# EAGLE board Needler_Rev_1_00 (EAGLE 6.4)
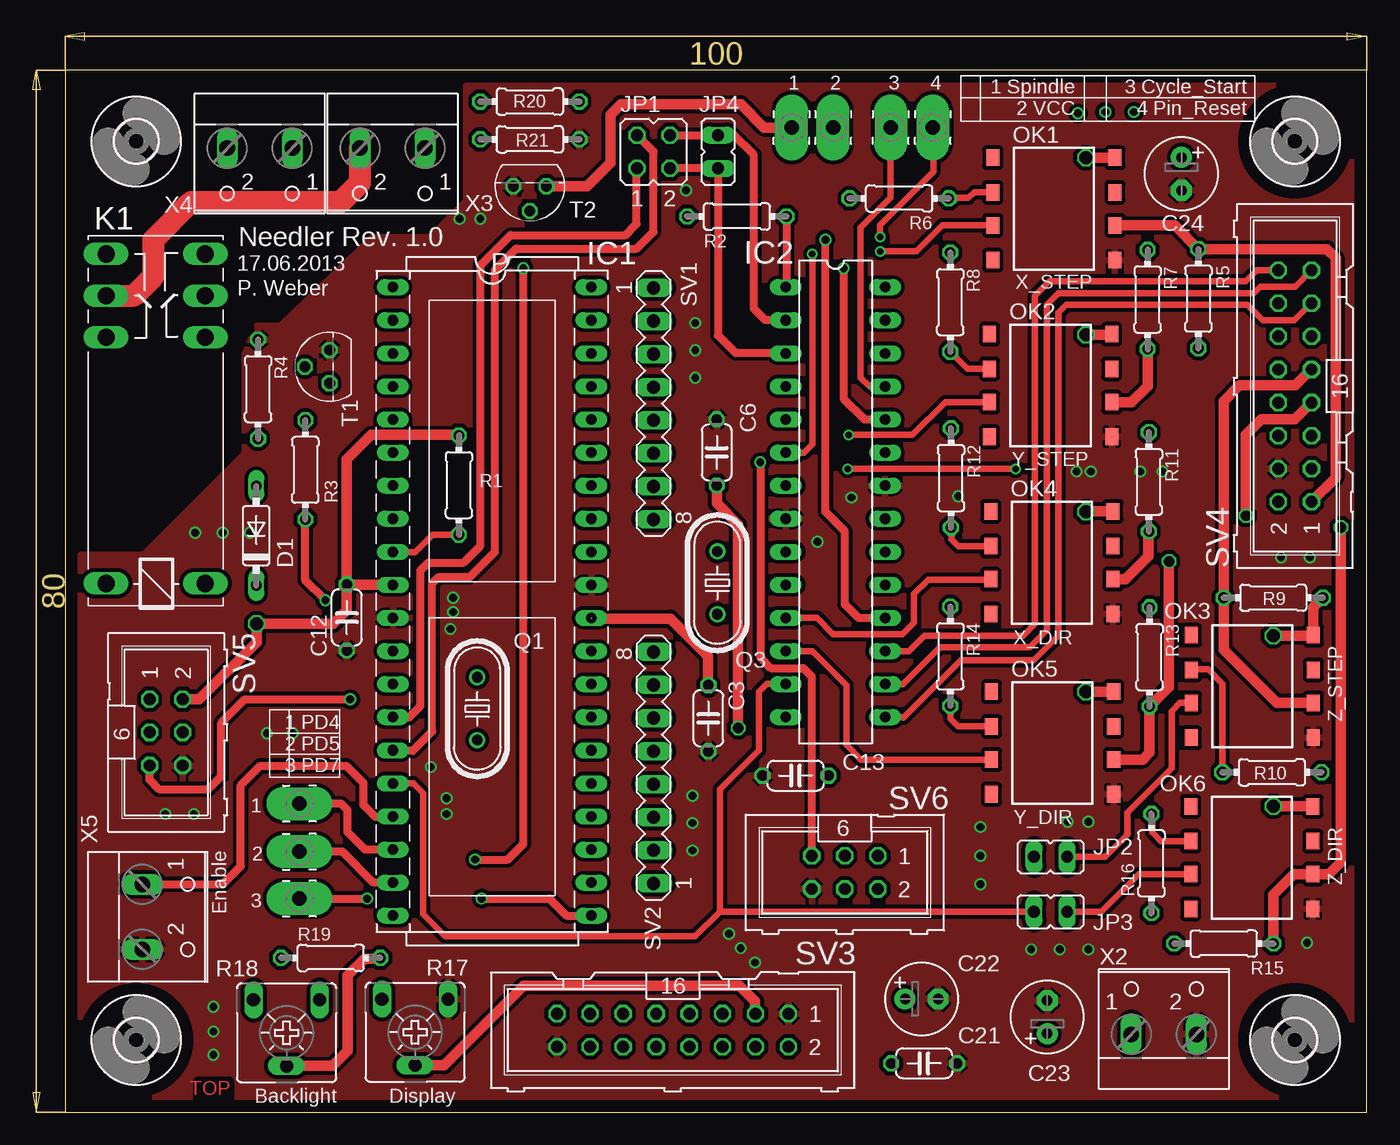
[diagram p0: board, top side]
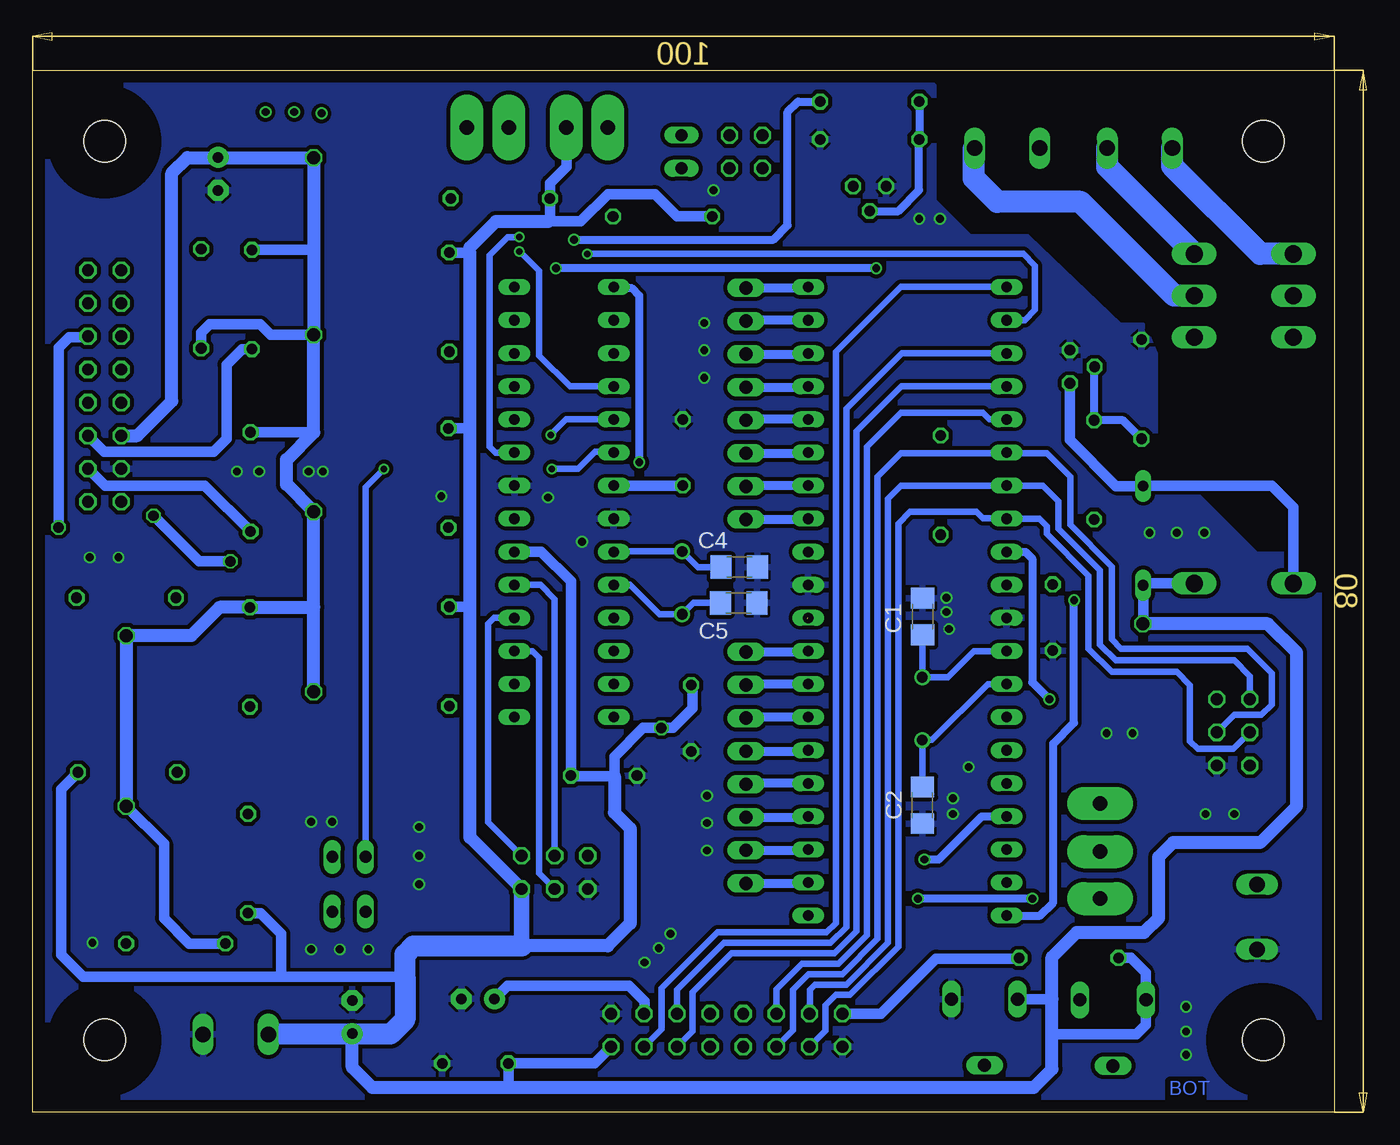
[diagram p1: board, bottom side, seen from below]

Size 100 x 80 mm. Coordinates in mm from the lower left corner, seen from the top.
Outline: 0,0 100,0 100,80 0,80 0,0
Copper layers (1*16): Top 0.035mm / dielectric 1.5mm / Bottom 0.035mm
Design rules "multi-cb_035um-cu *": minimum track width 6mil, minimum drill 12mil, track to track 6mil, track to pad 6mil, pad to pad 6mil, via to via 6mil, smd to smd 6mil, copper to edge 20mil, drill to drill 8mil, minimum pad ring 8mil, minimum via ring 6mil, stop-mask expansion 3mil, vias tented up to drill 0mil, thermal gap 8mil
tKeepout: 4 lines

## Footprints (pad centres in the part's own frame; a part is rotated, then mirrored left to right if it is on the bottom)
C1206 = smd 1.6 x 1.8: 1 -1.4,0; 2 1.4,0
C050-024X044 = drill 0.813 octagon: 1 -2.54,0; 2 2.54,0
E2,5-6 = drill 0.813 pad 1.6: + -1.27,0 | drill 0.813 pad 1.6 octagon: - 1.27,0
DO35-7 = drill 0.813 long: A 3.81,0; C -3.81,0
DIL40-SOCKET = drill 0.813 long: 1 -22.86,-7.62; 2 -20.32,-7.62; 3 -17.78,-7.62; 4 -15.24,-7.62; 5 -12.7,-7.62; 6 -10.16,-7.62; 7 -7.62,-7.62; 8 -5.08,-7.62; 9 -2.54,-7.62; 10 0,-7.62; 11 2.54,-7.62; 12 5.08,-7.62; 13 7.62,-7.62; 14 10.16,-7.62; 15 12.7,-7.62; 16 15.24,-7.62; 17 17.78,-7.62; 18 20.32,-7.62; 19 22.86,-7.62; 20 25.4,-7.62; 21 25.4,7.62; 22 22.86,7.62; 23 20.32,7.62; 24 17.78,7.62; 25 15.24,7.62; 26 12.7,7.62; 27 10.16,7.62; 28 7.62,7.62; 29 5.08,7.62; 30 2.54,7.62; 31 0,7.62; 32 -2.54,7.62; 33 -5.08,7.62; 34 -7.62,7.62; 35 -10.16,7.62; 36 -12.7,7.62; 37 -15.24,7.62; 38 -17.78,7.62; 39 -20.32,7.62; 40 -22.86,7.62
DIL28-3 = drill 0.813 long: 1 -16.51,-3.81; 2 -13.97,-3.81; 3 -11.43,-3.81; 4 -8.89,-3.81; 5 -6.35,-3.81; 6 -3.81,-3.81; 7 -1.27,-3.81; 8 1.27,-3.81; 9 3.81,-3.81; 10 6.35,-3.81; 11 8.89,-3.81; 12 11.43,-3.81; 13 13.97,-3.81; 14 16.51,-3.81; 15 16.51,3.81; 16 13.97,3.81; 17 11.43,3.81; 18 8.89,3.81; 19 6.35,3.81; 20 3.81,3.81; 21 1.27,3.81; 22 -1.27,3.81; 23 -3.81,3.81; 24 -6.35,3.81; 25 -8.89,3.81; 26 -11.43,3.81; 27 -13.97,3.81; 28 -16.51,3.81
JP2Q = drill 0.914 octagon: 1 -1.27,-1.27; 2 1.27,-1.27; 3 -1.27,1.27; 4 1.27,1.27
JP1 = drill 0.914 long: 1 0,-1.27; 2 0,1.27
HF118F = drill 1.321 long: 1 -13.8,-3.81; 2 -13.8,3.81; O1 5.1,3.81; O2 5.1,-3.81; P1 8.3,3.81; P2 8.3,-3.81; S1 11.5,3.81; S2 11.5,-3.81
SO8-GW300 = smd 1 x 1.27: 1 -4.69,3.937; 2 -4.69,1.27; 3 -4.69,-1.27; 4 -4.69,-3.937; 5 4.69,-3.937; 6 4.69,-1.27; 7 4.69,1.27; 8 4.69,3.937
2,54/1,1-2,54/5,08 = drill 1.118 pad 2.54 long: 1 0,0
HC49U-V = drill 0.813: 1 -2.413,0; 2 2.413,0
0204/7 = drill 0.813 octagon: 1 -3.81,0; 2 3.81,0
CA6V = drill 1.016 long: A -2.54,-2.54; E 2.54,-2.54; S 0,2.54
MA08-1 = drill 1.016 long: 1 -8.89,0; 2 -6.35,0; 3 -3.81,0; 4 -1.27,0; 5 1.27,0; 6 3.81,0; 7 6.35,0; 8 8.89,0
ML16 = drill 0.914 octagon: 1 -8.89,-1.27; 2 -8.89,1.27; 3 -6.35,-1.27; 4 -6.35,1.27; 5 -3.81,-1.27; 6 -3.81,1.27; 7 -1.27,-1.27; 8 -1.27,1.27; 9 1.27,-1.27; 10 1.27,1.27; 11 3.81,-1.27; 12 3.81,1.27; 13 6.35,-1.27; 14 6.35,1.27; 15 8.89,-1.27; 16 8.89,1.27
ML6 = drill 0.914 octagon: 1 -2.54,-1.27; 2 -2.54,1.27; 3 0,-1.27; 4 0,1.27; 5 2.54,-1.27; 6 2.54,1.27
TO92 = drill 0.813 octagon: 1 1.27,0; 2 0,1.905; 3 -1.27,0
3,2 = hole 3.2: 0,0
W237-102 = drill 1.194 long: 1 -2.5,-1.27; 2 2.5,-1.27

## Placement (x,y rotation side)
C1  22pF  [C1206]  31.64,38.05 90 bottom
C2  22pF  [C1206]  31.65,23.57 270 bottom
C3  100nF  [C050-024X044]  49.41,30.25 270 top
C4  22pF  [C1206]  45.71,41.86 0 bottom
C5  22pF  [C1206]  45.76,39.11 0 bottom
C6  100nF  [C050-024X044]  50.06,50.66 90 top
C12  100nF  [C050-024X044]  21.63,37.99 270 top
C13  100nF  [C050-024X044]  56.11,25.84 180 top
C21  100nF  [C050-024X044]  65.99,3.75 180 top
C22  1µF  [E2,5-6]  65.79,8.7 0 top
C23  100µF  [E2,5-6]  75.44,7.3 90 top
C24  100µF  [E2,5-6]  85.75,72.05 270 top
D1  1N4148DO35-7  [DO35-7]  14.68,44.27 90 top
IC1  MEGA32-P-SOCKET  [DIL40-SOCKET]  32.8,40.49 270 top
IC2  ATMEGA328  [DIL28-3]  59.17,46.84 270 top
JP1  UART  [JP2Q]  45.2,73.75 0 top
JP2  [JP1]  75.7,19.6 90 top
JP3  [JP1]  75.7,15.4 90 top
JP4  [JP1]  50.15,73.75 0 top
K1  Relais_Z  [HF118F]  6.96,54.4 90 top
OK1  6N139  [SO8-GW300]  75.95,69.36 0 top
OK2  6N139  [SO8-GW300]  75.7,55.8 0 top
OK3  6N139  [SO8-GW300]  91.2,32.7 0 top
OK4  6N139  [SO8-GW300]  75.8,42.2 0 top
OK5  6N139  [SO8-GW300]  75.85,28.35 0 top
OK6  6N139  [SO8-GW300]  91.15,19.55 0 top
PAD1  Cycle_Start  [2,54/1,1-2,54/5,08]  63.42,75.61 180 top
PAD2  Pin_Reset  [2,54/1,1-2,54/5,08]  66.65,75.6 180 top
PAD3  Spindle_Enable_Bit  [2,54/1,1-2,54/5,08]  55.8,75.6 0 top
PAD4  VCC  [2,54/1,1-2,54/5,08]  59,75.6 0 top
PAD5  CPU1_PD7  [2,54/1,1-2,54/5,08]  18,16.4 90 top
PAD6  CPU1_PD5  [2,54/1,1-2,54/5,08]  18,20 90 top
PAD7  CPU1_PD4  [2,54/1,1-2,54/5,08]  18,23.7 270 top
Q1  16MHz  [HC49U-V]  31.66,30.98 270 top
Q3  16MHz  [HC49U-V]  50.1,40.65 270 top
R1  10k  [0204/7]  30.25,48.15 270 top
R2  10k  [0204/7]  51.6,68.78 0 top
R3  1k  [0204/7]  18.45,49.32 90 top
R4  10k  [0204/7]  14.82,55.52 270 top
R5  470R  [0204/7]  87.05,62.47 90 top
R6  2k2  [0204/7]  64.07,70.17 0 top
R7  470R  [0204/7]  83.15,62.4 270 top
R8  2k2  [0204/7]  68,62.2 270 top
R9  470R  [0204/7]  92.8,39.5 180 top
R10  2k2  [0204/7]  92.7,26.1 180 top
R11  470R  [0204/7]  83.25,48.4 270 top
R12  2k2  [0204/7]  68.05,48.7 270 top
R13  470R  [0204/7]  83.3,34.95 270 top
R14  2k2  [0204/7]  68,35 270 top
R15  470R  [0204/7]  89,12.95 0 top
R16  2k2  [0204/7]  83.45,19.1 90 top
R17  10R  [CA6V]  26.88,6.14 180 top
R18  100R  [CA6V]  17.01,6.09 180 top
R19  100R je nach Backlight!  [0204/7]  20.4,11.85 0 top
R20  1k  [0204/7]  35.7,77.6 180 top
R21  10k  [0204/7]  35.7,74.7 180 top
SV1  Keyboard_B  [MA08-1]  45.2,54.4 270 top
SV2  Keyboard_B  [MA08-1]  45.2,26.45 90 top
SV3  LCD  [ML16]  46.68,6.3 180 top
SV4  AMW102/SV2  [ML16]  94.47,55.76 90 top
SV5  ISP-CPU1  [ML6]  7.76,29.16 270 top
SV6  ISP-CPU2  [ML6]  59.89,18.41 180 top
T1  BC337  [TO92]  20.32,57.24 90 top
T2  BC337  [TO92]  35.7,71.1 180 top
U$1  [3,2]  5.46,74.55 0 top
U$2  [3,2]  94.47,74.55 0 top
U$3  [3,2]  94.47,5.54 0 top
U$4  [3,2]  5.46,5.54 0 top
X2  5V-DC  [W237-102]  84.4,7.25 0 top
X3  230V-AC  [W237-102]  25.15,72.75 180 top
X4  230V-AC_Z-UP/DOWN  [W237-102]  14.95,72.75 180 top
X5  Enable 1xSchließer  [W237-102]  7.2,15 270 top

## Library data of the parts
C1-C6 C12 C13 C21-C24 R1-R16 R19-R21 = resistor
D1 = diode
IC1 = atmel
IC2 = avr
JP1-JP4 = jumper
K1 = relay
OK1-OK6 = optocoupler_PW
PAD1-PAD7 = wirepad
Q1 Q3 = crystal; OC_FARNELL: 1666969; OC_NEWARK: unknown
R17 R18 = pot
SV1 SV2 = con-lstb; OC_FARNELL: unknown; OC_NEWARK: unknown
SV3-SV6 = con-harting-ml; OC_FARNELL: unknown; OC_NEWARK: unknown
T1 T2 = transistor
U$1-U$4 = holes
X2-X5 = con-wago-500; MPN: 237-102; OC_FARNELL: unknown; OC_NEWARK: 70K9898

## Nets
+5V_AMW: C24.+ OK1.8 OK2.8 OK3.8 OK4.8 OK5.8 OK6.8 R5.1 R7.1 R9.1 R11.1 R13.1 R15.1 SV4.6
CPU1_PD4: IC1.18 PAD7.1
CPU1_PD5: IC1.19 PAD6.1
CPU1_PD7: IC1.21 PAD5.1
CPU1_RXD: IC1.14 JP1.1
CPU1_TXD: IC1.15 JP1.3
CPU2_RXD: IC2.2 JP1.4 JP4.2
CPU2_TXD: IC2.3 JP1.2 JP4.1
CYCLE_START: IC2.25 PAD1.1
D00: SV3.7
D01: SV3.8
D02: SV3.9
D03: SV3.10
D04: IC1.5 SV3.11
D05: IC1.6 SV3.12 SV5.4
D06: IC1.7 SV3.13 SV5.1
D07: IC1.8 SV3.14 SV5.3
E: IC1.4 SV3.6
ENABLE/FEED_HOLD: IC1.17 IC2.24 X5.1
ENABLE_AMW102: SV4.10
GND: C1.2 C2.2 C3.2 C4.2 C5.2 C6.2 C12.2 C13.2 C21.1 C22.- C23.- C24.- IC1.11 IC1.31 IC2.8 IC2.22 OK1.5 OK2.5 OK3.5 OK4.5 OK5.5 OK6.5 R4.1 R17.A R21.1 SV3.1 SV3.16 SV4.4 SV5.6 SV6.6 T1.1 T2.1 X2.2 X5.2
KEY_A0: IC1.40 SV1.1
KEY_A1: IC1.39 SV1.2
KEY_A2: IC1.38 SV1.3
KEY_A3: IC1.37 SV1.4
KEY_A4: IC1.36 SV1.5
KEY_A5: IC1.35 SV1.6
KEY_A6: IC1.34 SV1.7
KEY_A7: IC1.33 SV1.8
KEY_B0: IC1.22 SV2.1
KEY_B1: IC1.23 SV2.2
KEY_B2: IC1.24 SV2.3
KEY_B3: IC1.25 SV2.4
KEY_B4: IC1.26 SV2.5
KEY_B5: IC1.27 SV2.6
KEY_B6: IC1.28 SV2.7
KEY_B7: IC1.29 SV2.8
LED+: R18.S R19.2 SV3.15
N$1: C2.1 IC1.13 Q1.2
N$2: C1.1 IC1.12 Q1.1
N$3: K1.P1 X3.2
N$4: C5.1 IC2.10 Q3.2
N$5: C4.1 IC2.9 Q3.1
N$6: K1.S1 X4.2
N$7: K1.P2 X3.1
N$8: R3.2 R4.2 T1.2
N$9: D1.A K1.2 T1.3
N$10: OK2.2 R8.2
N$11: OK3.2 R10.2
N$12: K1.S2 X4.1
N$13: PAD3.1 T2.3
N$14: R20.2 R21.2 T2.2
N$18: OK1.2 R6.2
N$21: OK5.2 R14.2
N$23: OK6.2 R16.2
N$24: JP2.1 OK3.3
N$25: OK4.2 R12.2
N$26: JP3.1 OK6.3
PIN_RESET: IC2.23 PAD2.1
R/W: IC1.3 SV3.5
RESET_IC1: IC1.9 R1.2 SV5.5
RESET_IC2: IC2.1 R2.2 SV6.5
RS: IC1.1 SV3.4
SCK: IC2.19 SV6.3
SPINDLE_ENABLE_BIT: IC2.18 R20.1 SV6.1
VCC: C3.1 C6.1 C12.1 C13.1 C21.2 C23.+ D1.C IC1.10 IC1.30 IC2.7 IC2.20 K1.1 PAD4.1 R1.1 R2.1 R6.1 R8.1 R10.1 R12.1 R14.1 R16.1 R17.E R18.E R19.1 SV3.2 SV5.2 SV6.2 X2.1
VLCD: C22.+ R17.S SV3.3
X_DIR: IC2.11 OK4.3
X_DIR_AMW: OK4.6 R11.2 SV4.3
X_LIMIT: IC2.15 SV4.13
X_STEP: IC2.4 OK1.3
X_STEP_AMW: OK1.6 R5.2 SV4.1
Y_DIR: IC2.12 OK5.3
Y_DIR_AMW: OK5.6 R13.2 SV4.7
Y_LIMIT: IC2.16 SV4.15
Y_STEP: IC2.5 OK2.3
Y_STEP_AMW: OK2.6 R7.2 SV4.5
Z_DIR: IC1.16 IC2.13 JP3.2
Z_DIR_AMW: OK6.6 R15.2 SV4.11
Z_LIMIT: IC2.17 SV4.16 SV6.4
Z_STEP: IC1.2 IC2.6 JP2.2
Z_STEP_AMW: OK3.6 R9.2 SV4.9
Z_UP/DOWN: IC1.20 R3.1

## Tracks (layer width: path | path; a pad name or v marks a point on that pad's centre or on a via)
+5V_AMW  (via drill 1)
  Top 0.8: R9.1 95.89,38.78 OK3.8 95.85,36.6 v92.8,36.6 | 80.55,32.3 OK5.8 78.41,32.29 v78.4,32.3 | OK2.8 80.35,59.7 v78.4,59.7 | OK1.8 v78.4,73.3 | OK4.8 78.44,46.14 v78.4,46.1 | OK6.8 95.83,23.5 v92.8,23.5
  Bottom 0.8: R5.1 87.05,59.85 86.4,60.5 82.5,60.5 81.7,59.7 v78.4,59.7 | R7.1 78.51,66.21 78.4,66.1 | R11.1 78.41,52.21 78.4,52.2 | v92.8,23.5 89.9,20.6 89.9,14.9 87.95,12.95 R15.1
  Bottom 1: SV4.6 91.95,51.95 89.3,54.6 89.3,72.1 88.1,73.3 85.77,73.3 C24.+ 85.73,73.3 v78.4,73.3 78.4,66.1 v78.4,59.7 78.4,52.2 80.5,50.1 80.5,48.2 v78.4,46.1 78.4,38.8 | v78.4,32.3 78.4,38.8 | 78.4,38.8 78.44,38.76 R13.1 85.64,38.76 87.8,36.6 v92.8,36.6 v92.8,23.5
CPU1_PD4
  Top 0.6: IC1.18 23.03,20.17 21.7,21.5 21.7,23.2 21.2,23.7 PAD7.1
CPU1_PD5
  Top 0.6: IC1.19 23.67,17.63 21.3,20 PAD6.1
CPU1_PD7  (via drill 0.6)
  Top 0.6: PAD5.1 v23.2,16.4 | v32,16.4 37.2,16.4 38.5,15.1 IC1.21
  Bottom 0.6: v23.2,16.4 v32,16.4
CPU1_RXD
  Top 0.6: IC1.14 26.37,30.33 26.4,30.3 27.3,31.2 27.3,41.6 27.9,42.2 30.6,42.2 31.9,43.5 31.9,65.05 34.2,67.35 43.05,67.35 43.9,68.2 43.9,72.45 JP1.1
CPU1_TXD
  Top 0.6: IC1.15 25.22,27.75 26.7,27.75 28.2,29.25 28.2,40.6 28.7,41.1 31.1,41.1 33,43 33,64.65 34.65,66.3 43.9,66.3 45.2,67.6 45.2,73.75 JP1.3
CPU2_RXD
  Top 0.6: IC2.2 53.79,60.81 52.9,61.7 52.9,73.5 51.38,75.02 JP4.2 JP1.4
CPU2_TXD
  Top 0.6: JP1.2 JP4.1 50.15,59.65 51.5,58.3 55.33,58.3 IC2.3
CYCLE_START
  Top 0.5: IC2.25 61.77,55.73 61.1,56.4 61.1,67.9 63.4,70.2 63.4,75.59 PAD1.1
D04
  Bottom 0.5: IC1.5 26.5,53.2 27,53.7 33.3,53.7 35.9,51.1 35.9,13.6 38.1,11.4 40.9,11.4 42.87,9.43 SV3.11
D05
  Bottom 0.5: SV3.12 41.6,6.3 41.6,9.4 40.4,10.6 37.8,10.6 35.1,13.3 35.1,48.8 33.3,50.6 25.13,50.6 22.1,50.6 20.3,48.8 20.3,45.1 17.1,41.9 17.1,36.3 16.4,35.6 6.7,35.6 4.8,33.7 4.8,31.3 5.6,30.5 7.69,30.5 SV5.4
  Bottom 0.6: IC1.6 25.13,50.6
D06
  Bottom 0.5: SV3.13 40.3,7.6 40.3,9.4 39.9,9.8 37.5,9.8 34.3,13 34.3,47.1 33.3,48.1 IC1.7 22.41,48.11 21.2,46.9 21.2,44.8 18,41.6 18,35.9 16.8,34.7 7.7,34.7 6.49,33.49 SV5.1
D07
  Bottom 0.5: SV3.14 39.1,6.26 39.1,8.2 38.3,9 37.2,9 33.5,12.7 33.5,45.2 32.6,46.1 27.5,46.1 27,45.6 25.21,45.6 IC1.8 22.67,45.57 22.1,45 22.1,44.4 18.9,41.2 18.9,35.6 17.1,33.8 12.1,33.8 11.1,32.8 11.1,28.5 10.5,27.9 7.75,27.9 SV5.3
E
  Bottom 0.5: IC1.4 33.27,55.73 36.7,52.3 36.7,13.9 38.4,12.2 46.3,12.2 49.3,9.2 49.3,6.22 SV3.6
ENABLE/FEED_HOLD  (via drill 0.6)
  Top 0.6: X5.1 12.1,17.5 13.5,18.9 13.5,25.1 15,26.6 21.6,26.6 22.9,25.3 22.9,23.6 23.8,22.7 IC1.17 | v31.5,19.4 34,19.4 35.2,20.6 v35.2,64.8 | v59.8,64.8 59.8,54.8 61.4,53.2 IC2.24
  Bottom 0.5: IC1.17
  Bottom 0.6: IC1.17 27.1,22.7 30.4,19.4 v31.5,19.4 | v35.2,64.8 v59.8,64.8
GND  (via drill 0.6)
  other vias: 28.1,26.5 29.3,24.1 29.3,22.9 29.8,39.5 29.8,38.4 29.6,37.1 74.2,12.5 76.4,12.5 78.6,12.5 70.3,21.9 70.3,19.7 70.3,17.5 51,13.7 51.9,12.6 53,11.5 48.2,24.3 48.2,22.2 48.2,20.1 77,22.3 78.6,22.3 95.4,13 77.7,49.2 78.8,49.2 68.6,47.3 11.4,8.1 11.4,6.2 11.4,4.4 7.7,22.9 9.9,22.9 15.5,29.1 17.5,29.1 10,44.5 12.1,44.5 14.2,44.5 30.3,68.6 31.9,68.6 47.7,70.8 48.4,60.6 48.4,58.5 48.4,56.4 60.4,47.2 57.8,43.8 82.6,49.2 84.3,49.2 93.4,42.6 95.6,42.6
  pour Top (isolate 0.3): 1.2,1.2 98.8,1.2 98.8,78.8 30.8,78.8 30.8,70 28,67.2 23.6,67.2 16.5,60.4 14.7,60.4 13.8,58.2 13.8,50.6 6,42.8 1.2,42.8
  pour Bottom (isolate 0.3): 1.2,1.2 98.8,1.2 98.8,78.8 30.8,78.8 30.8,70 30.8,70 28,67.2 23.6,67.2 16.5,60.4 14.7,60.4 13.8,58.2 13.8,50.6 6,42.8 1.2,42.8
KEY_A0
  Bottom 0.7: SV1.1 40.42,63.29 IC1.40
KEY_A1
  Bottom 0.7: IC1.39 45.2,60.81 SV1.2
KEY_A2
  Bottom 0.7: SV1.3 40.42,58.21 IC1.38
KEY_A3
  Bottom 0.7: SV1.4 40.42,55.67 IC1.37
KEY_A4
  Bottom 0.7: IC1.36 45.2,53.19 SV1.5
KEY_A5
  Bottom 0.7: SV1.6 40.42,50.59 IC1.35
KEY_A6
  Bottom 0.7: IC1.34 45.2,48.11 SV1.7
KEY_A7
  Bottom 0.7: SV1.8 40.42,45.51 IC1.33
KEY_B0
  Bottom 0.7: SV2.1 40.42,17.56 IC1.22
KEY_B1
  Bottom 0.7: SV2.2 40.42,20.1 IC1.23
KEY_B2
  Bottom 0.7: SV2.3 40.42,22.64 IC1.24
KEY_B3
  Bottom 0.7: IC1.25 45.2,25.25 SV2.4
KEY_B4
  Bottom 0.7: SV2.5 40.42,27.72 IC1.26
KEY_B5
  Bottom 0.7: IC1.27 45.2,30.33 SV2.6
KEY_B6
  Bottom 0.7: IC1.28 45.2,32.87 SV2.7
KEY_B7
  Bottom 0.7: SV2.8 40.42,35.34 IC1.29
LED+
  Top 0.8: R18.S 20.55,3.55 21.7,4.7 21.7,10.5 23,11.8 24.16,11.8 R19.2
  Bottom 0.8: SV3.15 34.83,7.57 30.6,11.8 24.26,11.8 R19.2
N$1
  Bottom 0.5: IC1.13 26.63,32.87 30.9,28.6 31.62,28.6 Q1.2 31.66,24.98 C2.1
N$2
  Bottom 0.5: C1.1 31.64,33.42 Q1.1 29.7,33.4 27.69,35.41 IC1.12
N$3
  Top 1.7: K1.P1 5.3,62.7 6.8,64.2 6.8,67 9.7,69.9 21.2,69.9 22.65,71.35 X3.2
N$4
  Bottom 0.5: IC2.10 54.1,40.5 51.84,38.24 Q3.2 49.23,39.11 C5.1
N$5
  Bottom 0.5: IC2.9 55.33,43.06 Q3.1 48.9,41.86 C4.1
N$6
  Bottom 1.7: K1.S1 5.7,65.9 12.45,72.65 X4.2
N$7
  Bottom 1.3: 27.7,73.97 X3.1
  Bottom 1.7: K1.P2 12.3,62.7 19.5,69.9 25.9,69.9 27.7,71.7 27.7,73.97
N$8
  Bottom 0.6: T1.2 18.45,57.2 R3.2 16.25,53.13 R4.2
N$9
  Bottom 0.8: T1.3 20.32,51.62 16.78,48.08 D1.A 14.66,48.1 4.8,48.1 3.15,46.45 K1.2
N$10
  Top 0.5: OK2.2 69.32,57.07 R8.2
N$11
  Top 0.5: R10.2 88.89,32.91 87.8,34 86.54,34 OK3.2
N$12
  Bottom 1.7: K1.S2 17.45,72.58 X4.1
N$13
  Top 0.8: T2.3 40.1,71.1 41.9,72.9 41.9,76.6 42.7,77.4 51.9,77.4 53.7,75.6 PAD3.1
N$14
  Bottom 0.6: R20.2 R21.2 31.9,70.8 33.51,69.19 T2.2
N$15  (via drill 0.6)
  other vias: 77.8,76.7
N$16  (via drill 0.6)
  other vias: 79.9,76.8
N$17  (via drill 0.6)
  other vias: 82.1,76.8
N$18
  Top 0.5: OK1.2 69.83,70.63 69.4,70.2 67.91,70.2 R6.2
N$21
  Top 0.5: OK5.2 68.58,29.62 68,30.2 R14.2
N$23
  Top 0.5: OK6.2 84.18,20.82 83.5,21.5 83.5,22.86 R16.2
N$24
  Top 0.5: OK3.3 85.63,31.43 85,30.8 85,26.4 81.6,23 81.6,21.3 79.9,19.6 JP2.1
N$25
  Top 0.5: OK4.2 68.63,43.47 68.1,44 68.1,44.84 R12.2
N$26
  Top 0.5: JP3.1 79.6,15.4 82.48,18.28 OK6.3
PIN_RESET  (via drill 0.5)
  Top 0.5: PAD2.1 66.7,75.55 66.7,72.2 62.6,68.1 v62.6,67.2
  Bottom 0.5: IC2.23 64.45,50.65 64.9,51.1 64.9,65.8 63.5,67.2 v62.6,67.2
R/W
  Bottom 0.5: IC1.3 33.23,58.27 37.5,54 37.5,14.2 38.7,13 46.9,13 50.49,9.41 SV3.5
RESET_IC1  (via drill 0.6)
  Top 0.5: R1.2 28.24,44.34 26.9,43 25.21,43 IC1.9
  Top 0.6: SV5.5 6.49,25.51 7.2,24.8 11,24.8 12,25.8 12,29.9 13.8,31.7 v21.9,31.7
  Bottom 0.6: IC1.9 23.73,43.03 23.2,42.5 23.2,33 v21.9,31.7
RESET_IC2  (via drill 0.6)
  Top 0.6: R2.2 55.41,63.4 IC2.1 | v53.4,49.9 53.4,34.9 54.2,34.1 56.7,34.1 57.35,33.45 SV6.5
  Bottom 0.6: IC2.1 55.31,63.3 54,63.3 53.4,62.7 v53.4,49.9
RS
  Bottom 0.5: IC1.1 25.23,63.4 33.3,63.4 38.3,58.4 38.3,14.5 39,13.8 47.4,13.8 51.7,9.5 51.7,6.36 SV3.4
SCK
  Bottom 0.5: IC2.19 60.99,40.49 59.89,39.39 SV6.3
SPINDLE_ENABLE_BIT  (via drill 0.6)
  Top 0.6: IC2.18 60.95,37.95 59.9,39 59.9,44.6 58.4,46.1 v58.4,67
  Bottom 0.5: IC2.18 64.55,37.95 65,37.5 65,22.25 SV6.1
  Bottom 0.6: v58.4,67 43.1,67 42,68.1 42,76.8 41.2,77.6 R20.1
VCC  (via drill 0.8, 1)  (1 unrouted)
  Top 0.8: IC1.10 21.67,40.49 C12.1 | v51.7,29.5 51.7,45.1 50.06,46.74 C6.1 | C12.1 21.63,50.13 23.5,52 30.21,52 R1.1 | SV5.2 10.3,31.7 14.7,36.1 v14.7,37.5 20.6,37.5 21.63,38.53 C12.1 | 40.47,37.9 46.5,37.9 49.4,35 C3.1
  Bottom 0.8: R10.1 97.8,24.81 97.8,12.1 96.1,10.4 80.9,10.4 | C6.1 IC2.7 | 66.4,66.4 66.4,66 66.41,66.01 R8.1 | IC2.20 60.93,43.03 58.65,40.75 C13.1 58.61,25.8 55.3,25.8 55.3,27.3 53.1,29.5 v51.7,29.5 50.8,29.5 49.3,31 49.3,32.68 C3.1 | R14.1 66.49,38.81 66.4,38.9 | R12.1 66.41,52.51 66.4,52.5 | 80.9,10.4 71.4,10.4 | R16.1 82.49,15.29 80.9,13.7 80.9,10.4 | R17.E 21.72,8.68 21.7,8.7 | 21.7,6 15.2,6 14.47,6.73 R18.E 14.5,8.66 14.5,10.7 15.65,11.85 R19.1 | R2.1 47.81,68.8 50.5,68.8 52.2,70.5 55.8,70.5 57.9,68.4 60.4,68.4 60.26,68.54 R6.1 60.26,71.34 59,72.6 PAD4.1 | v14.7,37.5 14.68,37.52 D1.C 14.54,40.6 K1.1 | 63.1,1.9 63.45,2.25 C21.2 56.85,3.75 SV3.2
  Bottom 1: SV6.2 66.4,21.11 66.4,38.9 66.4,52.5 66.4,66 | 60.4,68.4 64.4,68.4 66.4,66.4 | 62.43,12.77 55.83,12.77 54.1,14.5 54.1,21.8 55.3,23 55.3,25.8 | C23.+ 75.44,3.44 73.9,1.9 63.1,1.9 23.1,1.9 21.7,3.3 21.7,6 21.7,8.7 21.7,11.9 19.8,13.8 14.6,13.8 13.5,14.9 13.5,19.6 12.4,20.7 5.7,20.7 2.9,23.5 2.9,35.3 5.1,37.5 v14.7,37.5
  Bottom 1.2: SV6.2 62.43,12.77
  Bottom 1.3: 75.41,6 C23.+ | X2.1 81.85,6.03
  Bottom 1.6: 62.43,12.77 70.73,12.77 71.4,12.1 71.4,10.4 71.4,7.1 72.5,6 75.41,6 | 81.85,6.03 C23.+
VLCD
  Top 0.8: SV3.3 53,7.6 53,8.5 51.8,9.7 35.2,9.7 29.1,3.6 R17.S
  Bottom 0.8: C22.+ 63.52,9.7 54.2,9.7 53,8.5 53,7.6 SV3.3
X_DIR
  Top 0.5: IC2.11 57.75,37.95 59,36.7 64.3,36.7 65.2,37.6 65.2,39.8 66.3,40.9 71.08,40.9 OK4.3
X_DIR_AMW
  Top 0.8: OK4.6 81.43,40.93 83.2,42.7 83.2,44.54 R11.2
  Bottom 0.8: SV4.3 94.43,48.1 86.76,48.1 R11.2
X_LIMIT
  Top 0.5: IC2.15 64.37,30.33 64.4,30.3 68.8,34.7 74.4,34.7 76.3,36.6 76.3,61.4 76.9,62 90.8,62 92,60.8 94.43,60.8 SV4.13
X_STEP  (via drill 0.5)
  Top 0.5: v62.6,66.1 65.4,66.1 67.4,68.1 OK1.3
  Bottom 0.5: IC2.4 58.73,55.73 61.1,58.1 61.1,64.6 v62.6,66.1
X_STEP_AMW
  Top 0.8: OK1.6 85.24,68.09 R5.2 96.92,66.28 97.6,65.6 97.6,48.73 SV4.1
Y_DIR
  Top 0.5: OK5.3 61.12,27.08 60,28.2 60,32.8 57.4,35.4 IC2.12
Y_DIR_AMW  (via drill 0.8)
  Top 0.8: OK5.6 82.78,27.08 83.3,27.6 R13.2 84.8,32.64 v84.8,42.3 | SV4.7 94.45,53.2 91.9,53.2 90.7,52 v90.7,45.8
  Bottom 0.8: v90.7,45.8 87.2,42.3 v84.8,42.3
Y_LIMIT
  Top 0.5: IC2.16 64.37,32.87 67.2,35.7 74.1,35.7 75.4,37 75.4,62 76.3,62.9 91.3,62.9 91.8,63.4 94.49,63.4 SV4.15
Y_STEP  (via drill 0.5)
  Top 0.5: v60.2,52 65.1,52 67.63,54.53 OK2.3
  Bottom 0.5: IC2.5 59.01,53.19 v60.2,52
Y_STEP_AMW
  Top 0.8: R7.2 83.15,55.75 81.9,54.5 80.42,54.5 OK2.6
  Bottom 0.8: R7.2 83.91,58.59 85.1,57.4 85.1,51.7 86.1,50.7 94.49,50.7 SV4.5
Z_DIR
  Top 0.5: IC1.16 26.75,25.25 27.5,24.5 27.5,15.2 29.2,13.5 48.4,13.5 50.3,15.4 | 50.3,15.4 50.3,24.8 53.3,27.8 53.3,32.3 53.9,32.9 55.33,32.9 IC2.13 | JP3.2 50.3,15.4
Z_DIR_AMW  (via drill 0.8)
  Top 0.8: R15.2 92.8,16.7 94.38,18.28 OK6.6 97.08,18.28 98,19.2 v98,44.9
  Bottom 0.8: v98,44.9 98,58.7 97.2,59.5 95.81,59.5 SV4.11
Z_LIMIT
  Top 0.5: IC2.17 64.81,35.41 66,36.6 73.6,36.6 74.5,37.5 74.5,62.7 75.6,63.8 90.7,63.8 91.55,64.65 SV4.16
  Bottom 0.5: IC2.17 61.61,35.41 61.1,34.9 61.1,18.35 SV6.4
Z_STEP  (via drill 0.5)
  Top 0.5: v57.4,65.9 57.4,51.3 56.75,50.65 IC2.6 | v73,49.4 v60.1,49.4
  Bottom 0.5: IC1.2 23.79,60.81 23,61.6 23,65 23.9,65.9 v57.4,65.9 | v60.1,49.4 58.1,49.4 56.8,50.7 55.41,50.7 IC2.6 | JP2.2 74.43,47.97 v73,49.4
Z_STEP_AMW
  Top 0.8: OK3.6 93.07,31.43 89,35.5 R9.2 89,54.6 90.2,55.8 94.51,55.8 SV4.9
Z_UP/DOWN  (via drill 0.6)
  Top 0.6: v20,39.3 18.45,40.84 R3.1
  Bottom 0.6: IC1.20 22.61,15.09 21.6,16.1 21.6,28.3 20,29.9 v20,39.3

## Text on the board
Top: TOP
Bottom: BOT
tNames: 1 | 2 | 3 | 4 | 1 Spindle / 2 VCC | 3 Cycle_Start / 4 Pin_Reset | Needler Rev. 1.0 | 17.06.2013 | P | P. Weber | X_STEP | Y_STEP | X_DIR | Z_STEP | 1 PD4 / 2 PD5 / 3 PD7 | 1 | Y_DIR | Z_DIR | Enable | 2 | 3 | Backlight | Display